# Altium PCB ATmega1280.PCBDOC
Units mm, origin at the board's own origin, x right, y up, seen from the top; angles counter-clockwise.
Board outline 152.4 x 101.6 mm, 2 copper layers (Top Layer, Bottom Layer); 30 components, 51 nets, 208 pads, 15 vias.
Unrouted connection lines stored in the file: 1.
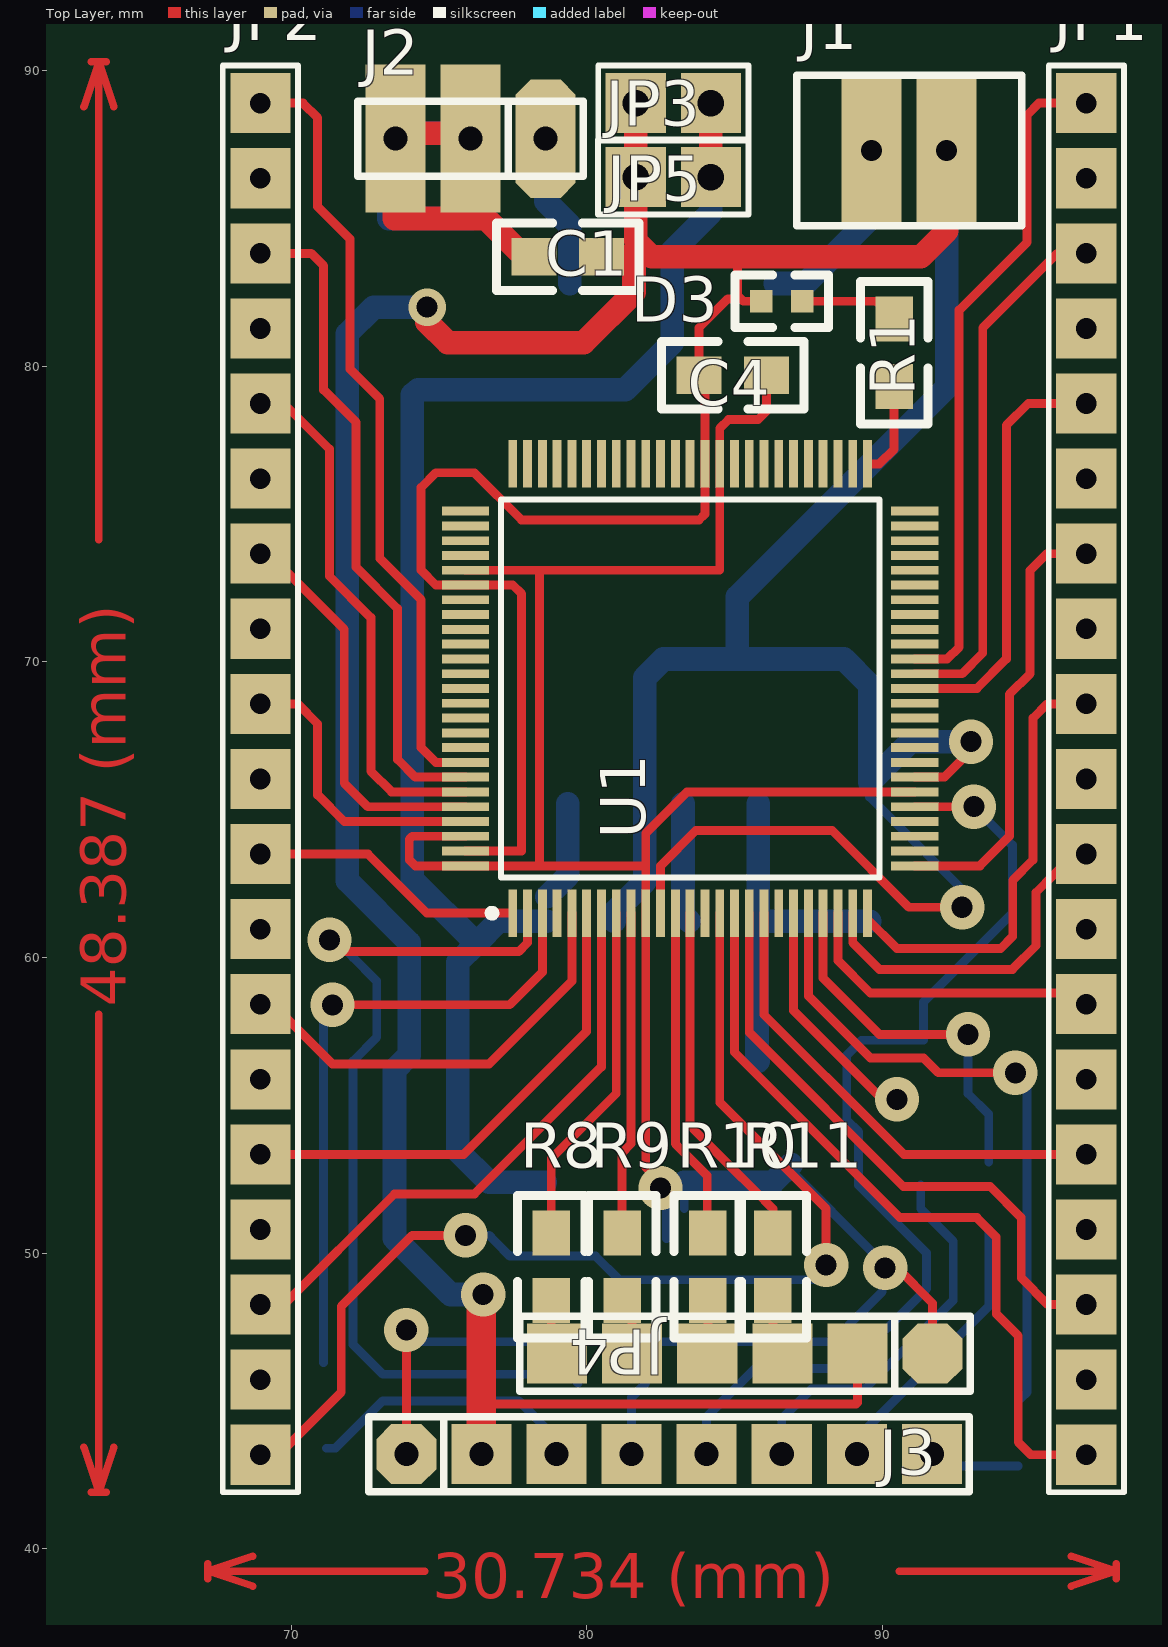
[diagram p0: Top Layer view]
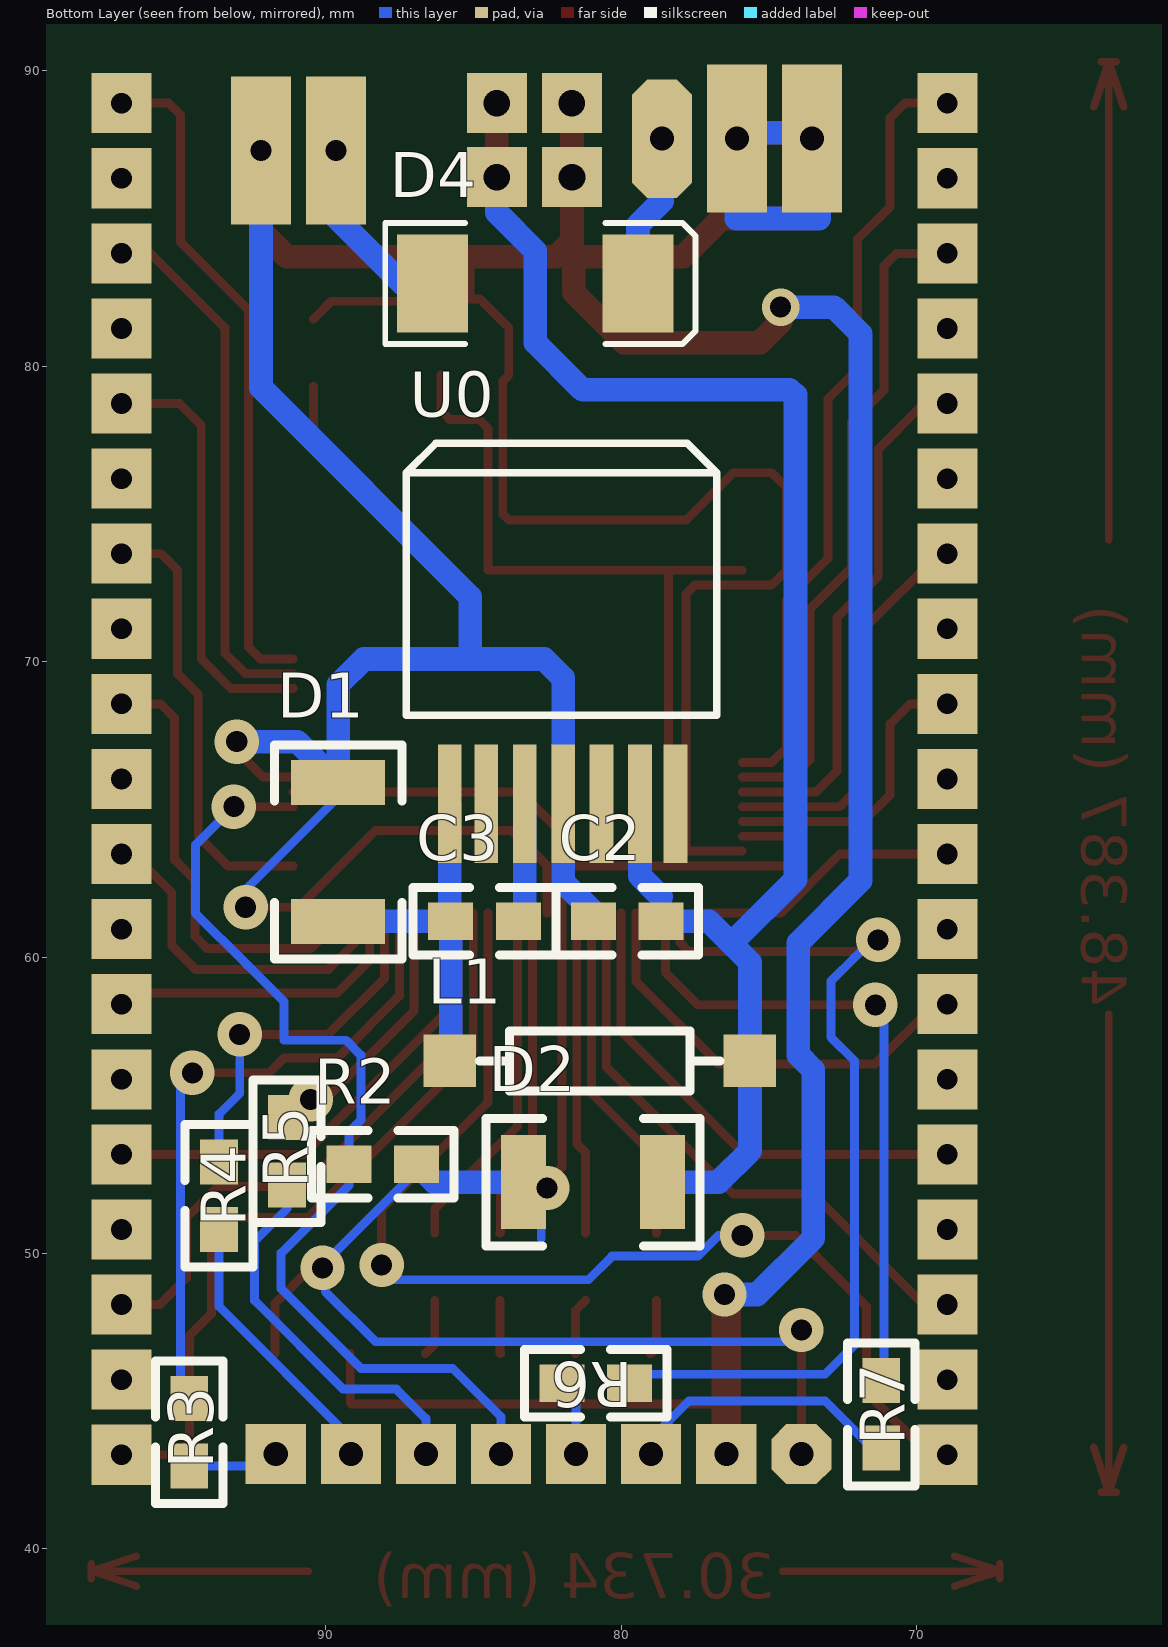
[diagram p1: Bottom Layer view, seen from below]

## Layer stack, top to bottom
Top Layer: signal copper 0.0356
Dielectric: dielectric 0.32, FR-4, Dk 4.8
Bottom Layer: signal copper 0.0356

## Board outline
25.4,25.4 177.8,25.4 177.8,127 25.4,127

## Design rules (kind name [scope] priority, off if disabled: settings)
Clearance [All] p1: gap=0.1
ComponentClearance [All] p1 off: gap=0.254 collisioncheckmode=0
PolygonConnect [All] p1: connectstyle=Relief reliefconductorwidth=0.254 reliefentries=4 polygonreliefangle="90 Angle"
RoutingLayers [All] p1: top layer=Horizontal bottom layer=Vertical
RoutingVias [All] p1: holewidth=0.711 width=1.27 viastyle="Through Hole" minholewidth=0.711 minwidth=1.27 maxholewidth=0.711 maxwidth=1.27
SolderMaskExpansion [All] p1: expansion=0.102
TestPointUsage [All] p1: valid=0 allowmultiple=FALSE
Testpoint [All] p1: side=15 testpointundercomponent=TRUE minsize=1.016 maxsize=2.54 preferedsize=1.524 minholesize=0 maxholesize=1.016 preferedholesize=0.813 testpointgrid=0.025 style=1023 order=1234567890
Width [All] p1: maxlimit=1 minlimit=0.3 preferedwidth=0.3
16 further rules are at their usual default settings.

## Components (designator, comment, footprint, x,y, rotation, side; value= is the part's Value field where it differs from the comment)
C1 "100nF" 0805 80.5,83.7 r180 top
C2 "100nF" 0805 80.936,61.224 r180 bottom
C3 "10nF" 0805 83.476,61.224 r0 bottom
C4 "100nF" 0805 83.8,79.7 r0 top
D1 "SR305" 1812 89.572,61.224 r90 bottom
D2 "" 1812 83.3,52.4 r180 bottom
D3 "verte" 0603 87.3,82.2 r180 top
D4 "Diode" DSO-C2/X3.3 82.9,82.8 r180 bottom
J1 "12V" CON2 87.1,87.3 r180 top
J2 "INT" TSIP3 78.613,87.7 r180 top
J3 "TCON8" TSIP8 73.9,43.2 r0 top
JP1 "Header 19" HDR1X19 96.901,43.18 r90 top
JP2 "Header 19" HDR1X19 68.961,43.18 r90 top
JP3 "Header 2" HDR1X2 84.201,88.9 r180 top
JP4 "Header 6" TSIP6 91.7,46.6 r180 top
JP5 "Header 2" HDR1X2 84.2,86.4 r180 top
L1 "33uH" TRES 85.8,56.5 r180 bottom
R1 "Res2" 0805 90.4,81.6 r270 top
R2 "Res2" 0805 89.2,53 r180 bottom
R3 "Res2" 0805 94.6,42.8 r90 bottom
R4 "Res2" 0805 93.6,50.8 r90 bottom
R5 "Res2" 0805 91.3,52.3 r90 bottom
R6 "Res2" 0805 82,45.6 r180 bottom
R7 "Res2" 0805 71.2,43.4 r90 bottom
R8 "Res2" 0805 78.8,48.4 r90 top
R9 "Res2" 0805 81.2,48.4 r90 top
R10 "Res2" 0805 84.1,48.4 r90 top
R11 "Res2" 0805 86.3,48.4 r90 top
U0 "LM2676" LM2676 86.8,71.2 r180 bottom
U1 "ATmega1280" F-QFP14x14-G100/X.3N 83.5,69.1 r90 top

## Footprints (in the part's own frame and the unit in brackets; to place one, negate y for a bottom-side part, rotate by r counter-clockwise, add the part's x,y. Pads: shape width x height; smd on the part's side, far side on the other; paste and mask are expansions set on the pad)
0603 [mil]
  rect 30x30 smd: 1(0,0) 2(55,0)
  silkscreen extent -35,-35 90,35
0805 [mil]
  rect 60x50 smd: 1(0,0) 2(90,0)
  silkscreen extent -50,-45 140,45
1812 [mil]
  rect 60x125 smd: 1(0,0) 2(185,0)
  silkscreen extent -50,-85 235,85
CON2 [mil]
  rect 80x196.85 hole 28: 1(-200,0) 2(-100,0)
  silkscreen extent -300,-100 0,100
DSO-C2/X3.3 [mm]
  rect 2.4x3.3 smd: 1(-3.475,0) 2(3.475,0)
  silkscreen extent -5.07,-2.05 5.43,2.05
F-QFP14x14-G100/X.3N [mm] "100-Pin Plastic Quad Flat Pack (TQFP)"
  rect 1.6x0.3 smd: 1(-7.6,6) 2(-7.6,5.5) 3(-7.6,5) 4(-7.6,4.5) 5(-7.6,4) 6(-7.6,3.5) 7(-7.6,3) 8(-7.6,2.5) 9(-7.6,2) 10(-7.6,1.5) 11(-7.6,1) 12(-7.6,0.5) 13(-7.6,0) 14(-7.6,-0.5) 15(-7.6,-1) 16(-7.6,-1.5) 17(-7.6,-2) 18(-7.6,-2.5) 19(-7.6,-3) 20(-7.6,-3.5) 21(-7.6,-4) 22(-7.6,-4.5) 23(-7.6,-5) 24(-7.6,-5.5) 25(-7.6,-6) 51(7.6,-6) 52(7.6,-5.5) 53(7.6,-5) 54(7.6,-4.5) 55(7.6,-4) 56(7.6,-3.5) 57(7.6,-3) 58(7.6,-2.5) 59(7.6,-2) 60(7.6,-1.5) 61(7.6,-1) 62(7.6,-0.5) 63(7.6,0) 64(7.6,0.5) 65(7.6,1) 66(7.6,1.5) 67(7.6,2) 68(7.6,2.5) 69(7.6,3) 70(7.6,3.5) 71(7.6,4) 72(7.6,4.5) 73(7.6,5) 74(7.6,5.5) 75(7.6,6)
  rect 0.3x1.6 smd: 26(-6,-7.6) 27(-5.5,-7.6) 28(-5,-7.6) 29(-4.5,-7.6) 30(-4,-7.6) 31(-3.5,-7.6) 32(-3,-7.6) 33(-2.5,-7.6) 34(-2,-7.6) 35(-1.5,-7.6) 36(-1,-7.6) 37(-0.5,-7.6) 38(0,-7.6) 39(0.5,-7.6) 40(1,-7.6) 41(1.5,-7.6) 42(2,-7.6) 43(2.5,-7.6) 44(3,-7.6) 45(3.5,-7.6) 46(4,-7.6) 47(4.5,-7.6) 48(5,-7.6) 49(5.5,-7.6) 50(6,-7.6) 76(6,7.6) 77(5.5,7.6) 78(5,7.6) 79(4.5,7.6) 80(4,7.6) 81(3.5,7.6) 82(3,7.6) 83(2.5,7.6) 84(2,7.6) 85(1.5,7.6) 86(1,7.6) 87(0.5,7.6) 88(0,7.6) 89(-0.5,7.6) 90(-1,7.6) 91(-1.5,7.6) 92(-2,7.6) 93(-2.5,7.6) 94(-3,7.6) 95(-3.5,7.6) 96(-4,7.6) 97(-4.5,7.6) 98(-5,7.6) 99(-5.5,7.6) 100(-6,7.6)
  silkscreen extent -7.72,-6.4 6.4,6.82
HDR1X2 [mil] "Connector; Header; 2 Position"
  rect 80x80 hole 35.43: 1(0,0) 2(100,0)
  silkscreen extent -50,-50 150,50
HDR1X19 [mil] "Connector; Header; 19 Position"
  rect 80x80 hole 27.56: 1(0,0) 2(100,0) 3(200,0) 4(300,0) 5(400,0) 6(500,0) 7(600,0) 8(700,0) 9(800,0) 10(900,0) 11(1000,0) 12(1100,0) 13(1200,0) 14(1300,0) 15(1400,0) 16(1500,0) 17(1600,0) 18(1700,0) 19(1800,0)
  silkscreen extent -50,-50 1850,50
LM2676 [mm]
  rect 0.8x4 smd: 1(1,-6) 2(2.24,-6) 3(3.54,-6) 4(4.84,-6) 5(6.14,-6) 6(7.44,-6) 7(8.64,-6)
  silkscreen extent -0.46,-3 10.04,6.2
TRES [mil]
  rect 70x70 smd: 1(0,0) 2(400,0)
  silkscreen extent 40,-40 360,40
TSIP3 [mil]
  oct 80x157.48 hole 32: 1(0,0)
  rect 80x196.85 hole 32: 2(100,0) 3(200,0)
  silkscreen extent -50,-50 250,50
TSIP6 [mil]
  oct 80x80 smd: 1(0,0)
  rect 80x80 smd: 2(100,0) 3(200,0) 4(300,0) 5(400,0) 6(500,0)
  silkscreen extent -50,-50 550,50
TSIP8 [mil]
  oct 80x80 hole 32: 1(0,0)
  rect 80x80 hole 32: 2(100,0) 3(200,0) 4(300,0) 5(400,0) 6(500,0) 7(600,0) 8(700,0)
  silkscreen extent -50,-50 750,50

## Part data
C1 C2 C4: library part CAP
C3: library part CONDO
D1 D2: library part DIODE
D3: library part LED
D4: "Default Diode"
J1: library part CON2
J2: library part TCON3
JP1 JP2: "Header, 19-Pin"
JP3 JP5: "Header, 2-Pin"
JP4: "Header, 6-Pin"
L1: library part RES2
R1 R2 R3 R4 R5 R6 R7 R8 R9 R10 R11: "Resistor"

## Via types
v1: diameter 1.5, hole 0.711, Top Layer to Bottom Layer, 14 vias
v2: diameter 1.27, hole 0.711, Top Layer to Bottom Layer, 1 vias

## Nets (pads, with @x,y where several pads share a name; then routed paths per layer and width w, separated by ;. In a path a pad name is that pad's centre, name@x,y a point inside that pad or via, vN(x,y) a via of type N, cw(c..) or ccw(c..) an arc to the next point about the centre after c; other vN are vias at no path point)
5V: C4.2 D2.1 J3.1 JP4.1 R2.2 U1.10 U1.31 U1.61 U1.80 U1.98 U1.100 | length 125.1
  Top Layer w0.3: U1.98 74.1,64.1 74,64 74,63.3 74.2,63.1 82,63.1 ; U1.80 84.5,73.1 U1.61 ; 78.4,63.1 78.4,73.1 ; v1(82.5,52.2) 82.5,52.4 82,52.9 82,64.2 83.4,65.6 U1.31 ; J3.1 v1(73.9,47.4) ; J3.1 v1(73.9,47.4) ; J3.1 v1(73.9,47.4) ; U1.61 84.5,77.9 ; U1.61 84.5,77.9 ; U1.61 84.5,77.9 ; 84.5,77.9 84.8,78.2 85.8,78.2 86.086,78.486 ; 86.086,78.486 C4.2 ; 86.086,78.486 C4.2 ; 86.086,78.486 C4.2 ; v1@90,49.5 v1@90.5,49.5 ; v1@90,49.5 v1@90.5,49.5 ; v1@90,49.5 v1@90.5,49.5 ; v1@90.5,49.5 91.7,48.3 ; JP4.1 91.7,48.3 ; JP4.1 91.7,48.3 ; JP4.1 91.7,48.3
  Bottom Layer w0.3: v1(82.5,52.2) 82.7,52.4 D2.1 D2.1@83.3,51.5 ; v1(73.9,47.4) v1@74.3,47 ; v1(73.9,47.4) v1@74.3,47 ; v1(73.9,47.4) v1@74.3,47 ; v1@74.3,47 88.3,47 90,48.7 ; 82.7,50.5 D2.1@82.7,51.8 ; 82.7,50.5 D2.1@82.7,51.8 ; 82.7,50.5 D2.1@82.7,51.8 ; R2.2@86.914,52.786 R2.2 ; R2.2@86.914,52.786 R2.2 ; R2.2@86.914,52.786 R2.2 ; R2.2@86.914,52.786 v1@89.7,50 ; v1@89.7,50 v1@90,50 ; v1@89.7,50 v1@90,50 ; v1@89.7,50 v1@90,50 ; 90,48.7 v1@90,49.5 ; 90,48.7 v1@90,49.5 ; 90,48.7 v1@90,50 ; 90,48.7 v1@90,50 ; 90,48.7 v1@90,49.5 ; v1@90,49.5 v1@90,50
  Bottom Layer w0.8: D2.1 R2.2@86.314,52.4 ; R2.2@86.314,52.4 R2.2 ; R2.2@86.314,52.4 R2.2 ; R2.2@86.314,52.4 R2.2
  other v1: 90.1,49.5
/RST: J3.5 R2.1 U1.30 | length 34
  Top Layer w0.3: U1.30 v1(93.1,65.1)
  Bottom Layer w0.3: J3.5 84.06,44.46 85.7,46.1 88.8,46.1 91.5,48.8 91.5,50 89.2,52.3 89.2,54.1 88.8,54.5 88.8,56.7 89.3,57.2 91.399,57.2 91.399,58.499 92.649,59.749 94.4,61.5 94.4,63.8 v1(93.1,65.1)
EN_RX: R8.2 U1.8 | length 11.7
  Top Layer w0.3: R8.2 78.8,53.2 81,55.4 U1.8
EN_TX: R9.2 U1.9 | length 10.9
  Top Layer w0.3: R9.2 81.2,53.4 81.5,53.7 U1.9
GND: C1.1 C2.1 C4.1 D1.2 D3.2 J1.1 J3.2 JP3.2 JP4.2 JP5.2 U0.4 U1.11 U1.32 U1.62 U1.81 U1.99 | length 275.8
  Top Layer w0.3: U1.99 77.8,63.6 77.8,72.3 77.5,72.6 74.9,72.6 74.4,73.1 74.4,75.9 74.9,76.4 76.2,76.4 77.8,74.8 83.8,74.8 84,75 84,79.5 C4.1 83.8,81.3 84.779,82.279 85.221,82.279 ; 76.44,44.9 89.12,44.9 89.16,44.94 JP4.2 ; v1@76.44,48.54 v1(76.5,48.6) ; 85.1,83.7 85.1,82.4 85.3,82.2 D3.2 ; U1.11 82.5,63.1 ; U1.11 82.5,63.1 ; U1.11 82.5,63.1 ; 82.5,63.1 83.7,64.3 88.3,64.3 90.9,61.7 ; 90.9,61.7 v1(92.7,61.7) ; 90.9,61.7 v1(92.7,61.7) ; 90.9,61.7 v1(92.7,61.7) ; U1.32 92.1,66.1 ; U1.32 92.1,66.1 ; U1.32 92.1,66.1 ; 92.1,66.1 v1@93,67 ; v1@93,67 v1(93,67.3) ; v1@93,67 v1(93,67.3) ; v1@93,67 v1(93,67.3)
  Top Layer w0.8: v2(74.6,82) 74.6,81.5 75.3,80.8 79.9,80.8 81.599,82.499 81.599,83.7 ; C1.1 81.599,83.7 ; JP5.2 81.66,84.24 82.2,83.7 91.3,83.7 92.18,84.58 J1.1 ; JP5.2 JP3.2 ; 81.9,84 81.599,83.7
  Top Layer w1: J3.2 v1@76.44,48.54
  Bottom Layer w0.3: v1(76.5,48.6) v1@76.9,48.2 ; D1.2@89.572,65.428 D1.2 ; D1.2@89.572,65.428 D1.2 ; D1.2@89.572,65.428 D1.2 ; D1.2@89.572,65.428 v1@92.7,62.3 ; v1(92.7,61.7) v1@92.7,62.3 ; v1(92.7,61.7) v1@92.7,62.3 ; v1(92.7,61.7) v1@92.7,62.3
  Bottom Layer w0.8: v2(74.6,82) 72.8,82 71.9,81.1 71.9,62.6 74,60.5 74,56.7 73.5,56.2 73.5,50.5 75.4,48.6 v1(76.5,48.6) ; C2.1 C2.1@80.936,61.536 ; C2.1 C2.1@80.936,61.536 ; C2.1 C2.1@80.936,61.536 ; C2.1@80.936,61.536 81.96,62.56 ; 81.96,62.56 U0.4 ; 81.96,62.56 U0.4 ; 81.96,62.56 81.96,69.46 ; 81.96,62.56 81.96,69.46 ; 81.96,62.56 U0.4 ; U0.4 81.96,69.46 ; 81.96,69.46 82.6,70.1 ; 82.6,70.1 85.1,70.1 ; 82.6,70.1 85.1,70.1 ; 82.6,70.1 88.7,70.1 ; 82.6,70.1 88.7,70.1 ; 82.6,70.1 85.1,70.1 ; 85.1,70.1 85.1,72.2 ; 85.1,70.1 85.1,72.2 ; 85.1,70.1 85.1,72.2 ; 85.1,70.1 88.7,70.1 ; 85.1,72.2 92.18,79.28 ; 88.7,70.1 89.572,69.228 ; D1.2 89.572,69.228 ; D1.2 90.949,67.3 ; D1.2 89.572,69.228 ; D1.2 90.949,67.3 ; D1.2 89.572,69.228 ; D1.2 90.949,67.3 ; 90.949,67.3 v1(93,67.3) ; 90.949,67.3 v1(93,67.3) ; 90.949,67.3 v1(93,67.3) ; 92.18,79.28 J1.1 ; 92.18,79.28 J1.1 ; 92.18,79.28 J1.1
MISO: R4.2 U1.22 | length 12.5
  Top Layer w0.3: U1.22 88,59.3 89.9,57.4 v1(92.9,57.4)
  Bottom Layer w0.3: v1(92.9,57.4) 92.9,55.4 93.6,54.7 R4.2
MOSI: R3.2 U1.21 | length 22.2
  Top Layer w0.3: U1.21 87.5,58.7 89.604,56.596 91.404,56.596 91.9,56.1 v1(94.5,56.1)
  Bottom Layer w0.3: v1(94.5,56.1) 94.9,55.7 94.9,45.3 94.686,45.086 R3.2
NetC1_2: C1.2 J2.2 J2.3 U0.2 | length 51.7
  Top Layer w0.8: J2.3@73.5,86.5 73.5,85 ; 76.55,85.05 C1.2@77.9,83.7 ; 73.5,85 76.5,85 76.1,85 ; 73.5,85 74,85 76.1,85 ; 76.1,85 76.1,86.7 76.1,85 ; C1.2@77.9,83.7 C1.2 ; C1.2@77.9,83.7 C1.2 ; C1.2@77.9,83.7 C1.2 ; J2.3@73.533,87.884 76.073,87.884 J2.3@73.533,87.884
  Bottom Layer w0.3: 73.3,85 J2.3@73.3,87.2 ; 73.3,85 J2.3@73.3,87.884 ; 73.3,85 J2.3@73.3,87.884 ; 73.3,85 J2.3@73.3,88.692 ; 73.3,85 J2.3@73.3,88.692 ; 73.3,85 J2.3@73.3,87.2 ; J2.3@73.3,87.2 J2.3@73.759,87.658 ; J2.3@73.3,87.2 J2.3@73.759,87.658 ; J2.3@73.3,87.2 J2.3@74,87.9 ; J2.3@73.3,87.2 J2.3@74,87.9 ; J2.3@73.3,87.2 J2.3@73.759,87.658 ; J2.3@73.3,87.2 J2.3@73.3,87.884 ; J2.3@73.3,87.884 J2.3@73.3,88.692 ; J2.3@73.759,87.658 J2.3@74,87.9
  Bottom Layer w0.8: J2.3@73.3,87.2 73.3,85 74,85 76.1,85 76.086,87.786 J2.2@76.086,87.871 ; J2.3@74,87.9 J2.2@75.6,87.9 ; J2.2@76.073,87.884 J2.2@76.086,87.871 ; J2.2@76.073,87.884 J2.2@76.086,87.871 ; J2.2@76.073,87.884 J2.2@76.086,87.871
NetC2_2: C2.2 D2.2 JP3.1 JP5.1 L1.2 U0.6 | length 123.6
  Top Layer w0.8: JP5.1 JP3.1 ; JP5.1 JP3.1 ; JP5.1 JP3.1
  Bottom Layer w0.3: 78.65,62.05 78.511,62.05 ; C2.2@78.511,61.224 C2.2 ; C2.2@78.511,61.224 78.511,62.05 ; C2.2@78.511,61.224 C2.2 ; C2.2@78.511,61.224 78.511,62.05 ; C2.2@78.511,61.224 78.511,62.05 ; C2.2@78.511,61.224 C2.2
  Bottom Layer w0.8: 78.65,62.05 79.36,62.76 ; 74.1,62.644 76.272,60.472 ; 74.1,62.644 76.272,60.472 ; 74.1,62.644 76.272,60.472 ; 74.1,62.644 76.272,60.472 ; 74.1,62.644 76.272,60.472 ; 74.1,62.644 76.272,60.472 ; 74.1,62.644 76.272,60.472 ; 74.1,62.644 74.1,79.034 74.3,79.2 81.3,79.2 82.9,80.8 82.9,83.9 84.2,85.2 ; 75.64,53.46 L1.2 ; 75.64,53.46 L1.2 ; 75.64,53.46 75.64,59.84 ; 75.64,53.46 75.64,59.84 ; 75.64,53.46 L1.2 ; 75.64,53.46 76.7,52.4 ; L1.2 75.64,59.84 ; 75.64,59.84 76.272,60.472 ; 75.64,59.84 76.272,60.472 ; 75.64,59.84 76.272,60.472 ; 75.64,59.84 77.024,61.224 ; 75.64,59.84 77.024,61.224 ; 75.64,59.84 76.272,60.472 ; 76.272,60.472 77.024,61.224 ; 76.7,52.4 D2.2 ; 76.7,52.4 D2.2 ; 76.7,52.4 D2.2 ; 77.024,61.224 C2.2@78.511,61.224 ; 77.024,61.224 C2.2@78.511,61.224 ; 77.024,61.224 C2.2 ; 77.024,61.224 C2.2 ; 77.024,61.224 C2.2@78.511,61.224 ; C2.2@78.511,61.224 C2.2 ; 79.36,62.76 U0.6 ; 79.36,62.76 U0.6 ; 79.36,62.76 U0.6 ; 84.2,85.2 JP5.1 ; 84.2,85.2 JP5.1 ; 84.2,85.2 JP5.1
NetC3_1: C3.1 U0.3 | length 12.2
  Bottom Layer w0.8: C3.1@83.26,61.44 C3.1 ; C3.1@83.26,61.44 U0.3 ; C3.1@83.26,61.44 C3.1 ; C3.1@83.26,61.44 U0.3 ; C3.1@83.26,61.44 U0.3 ; C3.1@83.26,61.44 C3.1
NetC3_2: C3.2 D1.1 L1.1 U0.1 | length 37.6
  Bottom Layer w0.8: L1.1@85.762,56.538 L1.1 ; L1.1@85.762,56.538 C3.2 ; L1.1@85.762,56.538 L1.1 ; L1.1@85.762,56.538 C3.2 ; L1.1@85.762,56.538 C3.2 ; L1.1@85.762,56.538 L1.1 ; C3.2 C3.2@85.8,61.262 ; C3.2 C3.2@85.8,61.262 ; C3.2 C3.2@85.8,61.262 ; C3.2@85.8,61.262 C3.2@85.838,61.224 ; C3.2@85.8,61.262 U0.1 ; C3.2@85.8,61.262 U0.1 ; C3.2@85.8,61.262 C3.2@85.838,61.224 ; C3.2@85.8,61.262 C3.2@85.838,61.224 ; C3.2@85.8,61.262 U0.1 ; C3.2@85.838,61.224 D1.1 ; C3.2@85.838,61.224 D1.1 ; C3.2@85.838,61.224 D1.1
NetC5_2: U1.33
NetC6_2: U1.34
NetD3_1: D3.1 R1.1 | length 10
  Top Layer w0.3: D3.1 R1.1@89.8,82.2 ; D3.1 R1.1@89.8,82.2 ; D3.1 R1.1@89.8,82.2 ; R1.1@89.8,82.2 R1.1 ; R1.1@89.8,82.2 R1.1 ; R1.1@89.8,82.2 R1.1
NetD4_1: D4.1 J1.2 | length 13
  Bottom Layer w0.8: D4.1 D4.1@87.4,82.8 ; D4.1 D4.1@87.4,82.8 ; D4.1 D4.1@87.4,82.8 ; D4.1@87.4,82.8 J1.2@89.64,85.04 ; J1.2@89.64,85.04 J1.2 ; J1.2@89.64,85.04 J1.2 ; J1.2@89.64,85.04 J1.2
NetD4_2: D4.2 J2.1 | length 14
  Bottom Layer w0.8: 78.613,85.587 J2.1@78.613,87.884 ; 78.613,85.587 J2.1@78.613,87.884 ; 78.613,85.587 J2.1@78.613,87.884 ; 78.613,85.587 79.425,84.775 ; D4.2 79.425,84.775 ; D4.2 79.425,84.775 ; D4.2 79.425,84.775
NetJ3_3: J3.3 R7.1 | length 9.5
  Bottom Layer w0.3: R7.1 71.5,43.4 73.1,45 77.7,45 78.98,43.72 J3.3
NetJ3_4: J3.4 R6.1 | length 2.6
  Bottom Layer w0.3: J3.4 81.52,45.12 R6.1
NetJ3_6: J3.6 R5.1 | length 13
  Bottom Layer w0.3: J3.6 86.6,44.4 87.6,45.4 89.4,45.4 92.4,48.4 92.4,50.4 91.3,51.5 R5.1
NetJ3_7: J3.7 R4.1 | length 9.4
  Bottom Layer w0.3: J3.7 89.14,43.74 93.6,48.2 R4.1
NetJ3_8: J3.8 R3.1 | length 3.1
  Bottom Layer w0.3: J3.8 92.08,42.8 R3.1
NetJP4_3: JP4.3 R11.1 | length 1.9
  Top Layer w0.3: R11.1 86.3,46.92 JP4.3
NetJP4_4: JP4.4 R10.1 | length 1.8
  Top Layer w0.3: JP4.4 84.1,46.62 R10.1
NetJP4_5: JP4.5 R9.1 | length 1.9
  Top Layer w0.3: R9.1 81.54,48.06 JP4.5
NetJP4_6: JP4.6 R8.1 | length 1.9
  Top Layer w0.3: R8.1 78.8,46.8 JP4.6
NetR1_2: R1.2 U1.51 | length 8.2
  Top Layer w0.3: U1.51 89.9,76.7 ; U1.51 89.9,76.7 ; U1.51 89.9,76.7 ; 89.9,76.7 90.4,77.2 ; 90.4,77.2 R1.2 ; 90.4,77.2 R1.2 ; 90.4,77.2 R1.2
RX_RADIO: R10.2 U1.12 | length 11.3
  Top Layer w0.3: U1.12 83,53.7 84.08,52.62 84.08,50.706 R10.2
RXUC: R6.2 U1.2 | length 31
  Top Layer w0.3: v1(71.3,60.6) 71.7,60.2 77.7,60.2 78,60.5 U1.2
  Bottom Layer w0.3: v1(71.3,60.6) 71.5,60.6 72.1,60 72.85,59.25 72.9,59.2 72.9,57.3 72.1,56.5 72.1,46.9 73.1,45.9 79.414,45.9 R6.2
SCK: R5.2 U1.20 | length 15.6
  Top Layer w0.3: 87,58.2 U1.20 ; 87,58.2 U1.20 ; 87,58.2 U1.20 ; 87,58.2 v1@90,55.2 ; v1@90,55.2 v1(90.5,55.2) ; v1@90,55.2 v1(90.5,55.2) ; v1@90,55.2 v1(90.5,55.2)
SERVO1: JP1.7 U1.23 | length 14.9
  Top Layer w0.3: 88.5,59.9 U1.23 ; 88.5,59.9 U1.23 ; 88.5,59.9 U1.23 ; 88.5,59.9 89.6,58.8 JP1.7@96.521,58.8 ; JP1.7@96.521,58.8 JP1.7 ; JP1.7@96.521,58.8 JP1.7 ; JP1.7@96.521,58.8 JP1.7
SERVO2: JP1.9 U1.24 | length 14.7
  Top Layer w0.3: 89,60.5 U1.24 ; 89,60.5 U1.24 ; 89,60.5 U1.24 ; 89,60.5 89.9,59.6 94.4,59.6 95.2,60.4 95.2,62.2 95.8,62.8 JP1.9@96.5,63.5 ; JP1.9@96.5,63.5 JP1.9 ; JP1.9@96.5,63.5 JP1.9 ; JP1.9@96.5,63.5 JP1.9
SERVO3: JP1.11 U1.25 | length 18.4
  Top Layer w0.3: U1.25@89.5,61.3 U1.25 ; U1.25@89.5,61.3 U1.25 ; U1.25@89.5,61.3 U1.25 ; U1.25@89.5,61.3 90.5,60.3 94,60.3 94.413,60.713 94.413,62.613 95.1,63.3 95.1,68.1 95.58,68.58 ; 95.58,68.58 JP1.11 ; 95.58,68.58 JP1.11 ; 95.58,68.58 JP1.11
SERVO4: JP1.13 U1.26 | length 22.1
  Top Layer w0.3: U1.26 93.3,63.1 ; U1.26 93.3,63.1 ; U1.26 93.3,63.1 ; 93.3,63.1 94.3,64.1 94.3,68.9 95,69.6 95,73.1 95.56,73.66 ; 95.56,73.66 JP1.13 ; 95.56,73.66 JP1.13 ; 95.56,73.66 JP1.13
SERVO5: JP2.7 U1.5 | length 20.3
  Top Layer w0.3: JP2.7 JP2.7@69.38,58.42 ; JP2.7 JP2.7@69.38,58.42 ; JP2.7 JP2.7@69.38,58.42 ; JP2.7@69.38,58.42 71.4,56.4 76.7,56.4 79.5,59.2 ; 79.5,59.2 U1.5 ; 79.5,59.2 U1.5 ; 79.5,59.2 U1.5
SERVO6: JP2.5 U1.6 | length 38.5
  Top Layer w0.3: JP2.5 75.84,53.34 ; JP2.5 75.84,53.34 ; JP2.5 75.84,53.34 ; 75.84,53.34 76.5,54 80,57.5 ; 80,57.5 U1.6 ; 80,57.5 U1.6 ; 80,57.5 U1.6
SERVO7: JP2.3 U1.7 | length 32.1
  Top Layer w0.3: JP2.3 JP2.3@69.76,48.26 ; JP2.3 JP2.3@69.76,48.26 ; JP2.3 JP2.3@69.76,48.26 ; JP2.3@69.76,48.26 73.5,52 76.2,52 80.5,56.3 ; 80.5,56.3 U1.7 ; 80.5,56.3 U1.7 ; 80.5,56.3 U1.7
SERVO8: JP2.9 U1.1 | length 22.4
  Top Layer w0.3: JP2.9 72.6,63.5 ; JP2.9 72.6,63.5 ; JP2.9 72.6,63.5 ; 72.6,63.5 74.6,61.5 ; 74.6,61.5 U1.1 ; 74.6,61.5 U1.1 ; 74.6,61.5 U1.1
SERVO9: JP1.15 U1.38 | length 22.5
  Top Layer w0.3: U1.38 93.2,69.1 ; U1.38 93.2,69.1 ; U1.38 93.2,69.1 ; 93.2,69.1 94.2,70.1 94.2,78 94.94,78.74 ; 94.94,78.74 JP1.15 ; 94.94,78.74 JP1.15 ; 94.94,78.74 JP1.15
SERVO10: JP1.17 U1.39 | length 23.3
  Top Layer w0.3: U1.39 92.7,69.6 ; U1.39 92.7,69.6 ; U1.39 92.7,69.6 ; 92.7,69.6 93.4,70.3 93.4,81.3 JP1.17@95.92,83.82 ; JP1.17@95.92,83.82 JP1.17 ; JP1.17@95.92,83.82 JP1.17 ; JP1.17@95.92,83.82 JP1.17
SERVO11: JP1.19 U1.40 | length 28.2
  Top Layer w0.3: U1.40 92.2,70.1 ; U1.40 92.2,70.1 ; U1.40 92.2,70.1 ; 92.2,70.1 92.6,70.5 92.6,81.9 94.9,84.2 94.9,88.5 95.3,88.9 ; 95.3,88.9 JP1.19 ; 95.3,88.9 JP1.19 ; 95.3,88.9 JP1.19
SERVO12: JP1.5 U1.18 | length 35.5
  Top Layer w0.3: 86,58.066 U1.18 ; 86,58.066 U1.18 ; 86,58.066 U1.18 ; 86,58.066 90.153,53.913 90.726,53.34 ; 90.726,53.34 JP1.5 ; 90.726,53.34 JP1.5 ; 90.726,53.34 JP1.5
SERVO13: JP1.3 U1.17 | length 31.1
  Top Layer w0.3: 85.5,57.466 U1.17 ; 85.5,57.466 U1.17 ; 85.5,57.466 U1.17 ; 85.5,57.466 90.712,52.253 93.647,52.253 94.7,51.2 94.7,49.16 95.6,48.26 ; 95.6,48.26 JP1.3 ; 95.6,48.26 JP1.3 ; 95.6,48.26 JP1.3
SERVO14: JP1.1 U1.16 | length 39
  Top Layer w0.3: 85,56.8 U1.16 ; 85,56.8 U1.16 ; 85,56.8 U1.16 ; 85,56.8 90.6,51.2 93.2,51.2 93.857,50.543 93.857,47.943 94.6,47.2 94.6,43.6 95.02,43.18 ; 95.02,43.18 JP1.1 ; 95.02,43.18 JP1.1 ; 95.02,43.18 JP1.1
SERVO15: JP2.1 U1.15 | length 39.5
  Top Layer w0.3: v1(75.9,50.6) 74.1,50.6 71.7,48.2 71.7,45.3 JP2.1@69.58,43.18 ; U1.15 84.5,55.1 88.1,51.5 v1(88.1,49.6) ; JP2.1 JP2.1@69.58,43.18 ; JP2.1 JP2.1@69.58,43.18 ; JP2.1 JP2.1@69.58,43.18
  Bottom Layer w0.3: v1(75.9,50.6) 76.7,50.6 76.9,50.4 77.4,49.9 80.3,49.9 81.1,49.1 87.9,49.1 88.1,49.3 v1(88.1,49.6)
SERVO16: JP2.11 U1.97 | length 20.7
  Top Layer w0.3: JP2.11 70.22,68.58 ; JP2.11 70.22,68.58 ; JP2.11 70.22,68.58 ; 70.22,68.58 70.9,67.9 70.9,65.5 71.8,64.6 ; 71.8,64.6 U1.97 ; 71.8,64.6 U1.97 ; 71.8,64.6 U1.97
SERVO17: JP2.13 U1.96 | length 20.7
  Top Layer w0.3: JP2.13 JP2.13@69.24,73.66 ; JP2.13 JP2.13@69.24,73.66 ; JP2.13 JP2.13@69.24,73.66 ; JP2.13@69.24,73.66 71.8,71.1 71.8,65.9 72.6,65.1 ; 72.6,65.1 U1.96 ; 72.6,65.1 U1.96 ; 72.6,65.1 U1.96
SERVO18: JP2.15 U1.95 | length 24.5
  Top Layer w0.3: JP2.15 JP2.15@69.76,78.74 ; JP2.15 JP2.15@69.76,78.74 ; JP2.15 JP2.15@69.76,78.74 ; JP2.15@69.76,78.74 71.3,77.2 71.3,72.9 72.7,71.5 72.7,66.3 73.4,65.6 ; 73.4,65.6 U1.95 ; 73.4,65.6 U1.95 ; 73.4,65.6 U1.95
SERVO19: JP2.17 U1.94 | length 29.4
  Top Layer w0.3: JP2.17 70.68,83.82 ; JP2.17 70.68,83.82 ; JP2.17 70.68,83.82 ; 70.68,83.82 71.1,83.4 71.1,79.2 72.2,78.1 72.2,73.2 73.6,71.8 73.6,66.7 74.2,66.1 ; 74.2,66.1 U1.94 ; 74.2,66.1 U1.94 ; 74.2,66.1 U1.94
SERVO20: JP2.19 U1.93 | length 31.5
  Top Layer w0.3: JP2.19 70.4,88.9 ; JP2.19 70.4,88.9 ; JP2.19 70.4,88.9 ; 70.4,88.9 70.9,88.4 70.9,85.4 72,84.3 72,79.9 73,78.9 73,73.5 74.4,72.1 74.4,67.1 74.9,66.6 ; 74.9,66.6 U1.93 ; 74.9,66.6 U1.93 ; 74.9,66.6 U1.93
TX_RADIO: R11.2 U1.13 | length 12
  Top Layer w0.3: U1.13 83.5,54.3 84.858,52.942 85.7,52.1 86.3,51.5 R11.2
TXUC: R7.2 U1.3 | length 38.6
  Top Layer w0.3: v1(71.4,58.4) 77.4,58.4 ; v1(71.4,58.4) 77.4,58.4 ; v1(71.4,58.4) 77.4,58.4 ; 77.4,58.4 78.5,59.5 ; 78.5,59.5 U1.3 ; 78.5,59.5 U1.3 ; 78.5,59.5 U1.3
  Bottom Layer w0.3: R7.2@71.1,46.3 v1@71.1,58.1 ; v1@71.1,58.1 v1(71.4,58.4) ; v1@71.1,58.1 v1(71.4,58.4) ; v1@71.1,58.1 v1(71.4,58.4)
pads on no net: JP1.2 JP1.4 JP1.6 JP1.8 JP1.10 JP1.12 JP1.14 JP1.16 JP1.18 JP2.2 JP2.4 JP2.6 JP2.8 JP2.10 JP2.12 JP2.14 JP2.16 JP2.18 U0.5 U0.7 U1.4 U1.14 U1.19 U1.27 U1.28 U1.29 U1.35 U1.36 U1.37 U1.41 U1.42 U1.43 U1.44 U1.45 U1.46 U1.47 U1.48 U1.49 U1.50 U1.52 U1.53 U1.54 U1.55 U1.56 U1.57 U1.58 U1.59 U1.60 U1.63 U1.64 U1.65 U1.66 U1.67 U1.68 U1.69 U1.70 U1.71 U1.72 U1.73 U1.74 U1.75 U1.76 U1.77 U1.78 U1.79 U1.82 U1.83 U1.84 U1.85 U1.86 U1.87 U1.88 U1.89 U1.90 U1.91 U1.92
copper on no net: | length 61.9
  Top Layer w0.254: 62.992,43.434 63.5,41.91 ; 62.992,88.773 63.5,90.297 ; 63.246,41.91 63.754,41.91 ; 63.246,90.297 63.754,90.297 ; 63.5,58.08 63.5,41.91 ; 63.5,74.127 63.5,90.297 ; 64.008,43.434 63.5,41.91 ; 64.008,88.773 63.5,90.297 ; 67.183,38.989 67.183,39.497 ; 68.707,38.735 67.183,39.243 ; 68.707,39.751 67.183,39.243 ; 74.526,39.243 67.183,39.243 ; 90.574,39.243 97.917,39.243 ; 96.393,38.735 97.917,39.243 ; 96.393,39.751 97.917,39.243 ; 97.917,38.989 97.917,39.497

## Other copper
Top Layer:
  text "48.387 (mm)" at 64.414,58.334 h1.52 r90
  text "30.734 (mm)" at 74.78,38.329 h1.52